# Altium PCB PCB.PcbDoc (part 3 of 3)
Units mm, origin at the board's own origin, x right, y up, seen from the top; angles counter-clockwise.
Board outline 82.04 x 50.04 mm, 4 copper layers (Top Layer, Layer 1, Layer 2, Bottom Layer), stack 1.604 mm thick; 179 components, 140 nets, 1023 pads, 520 vias.
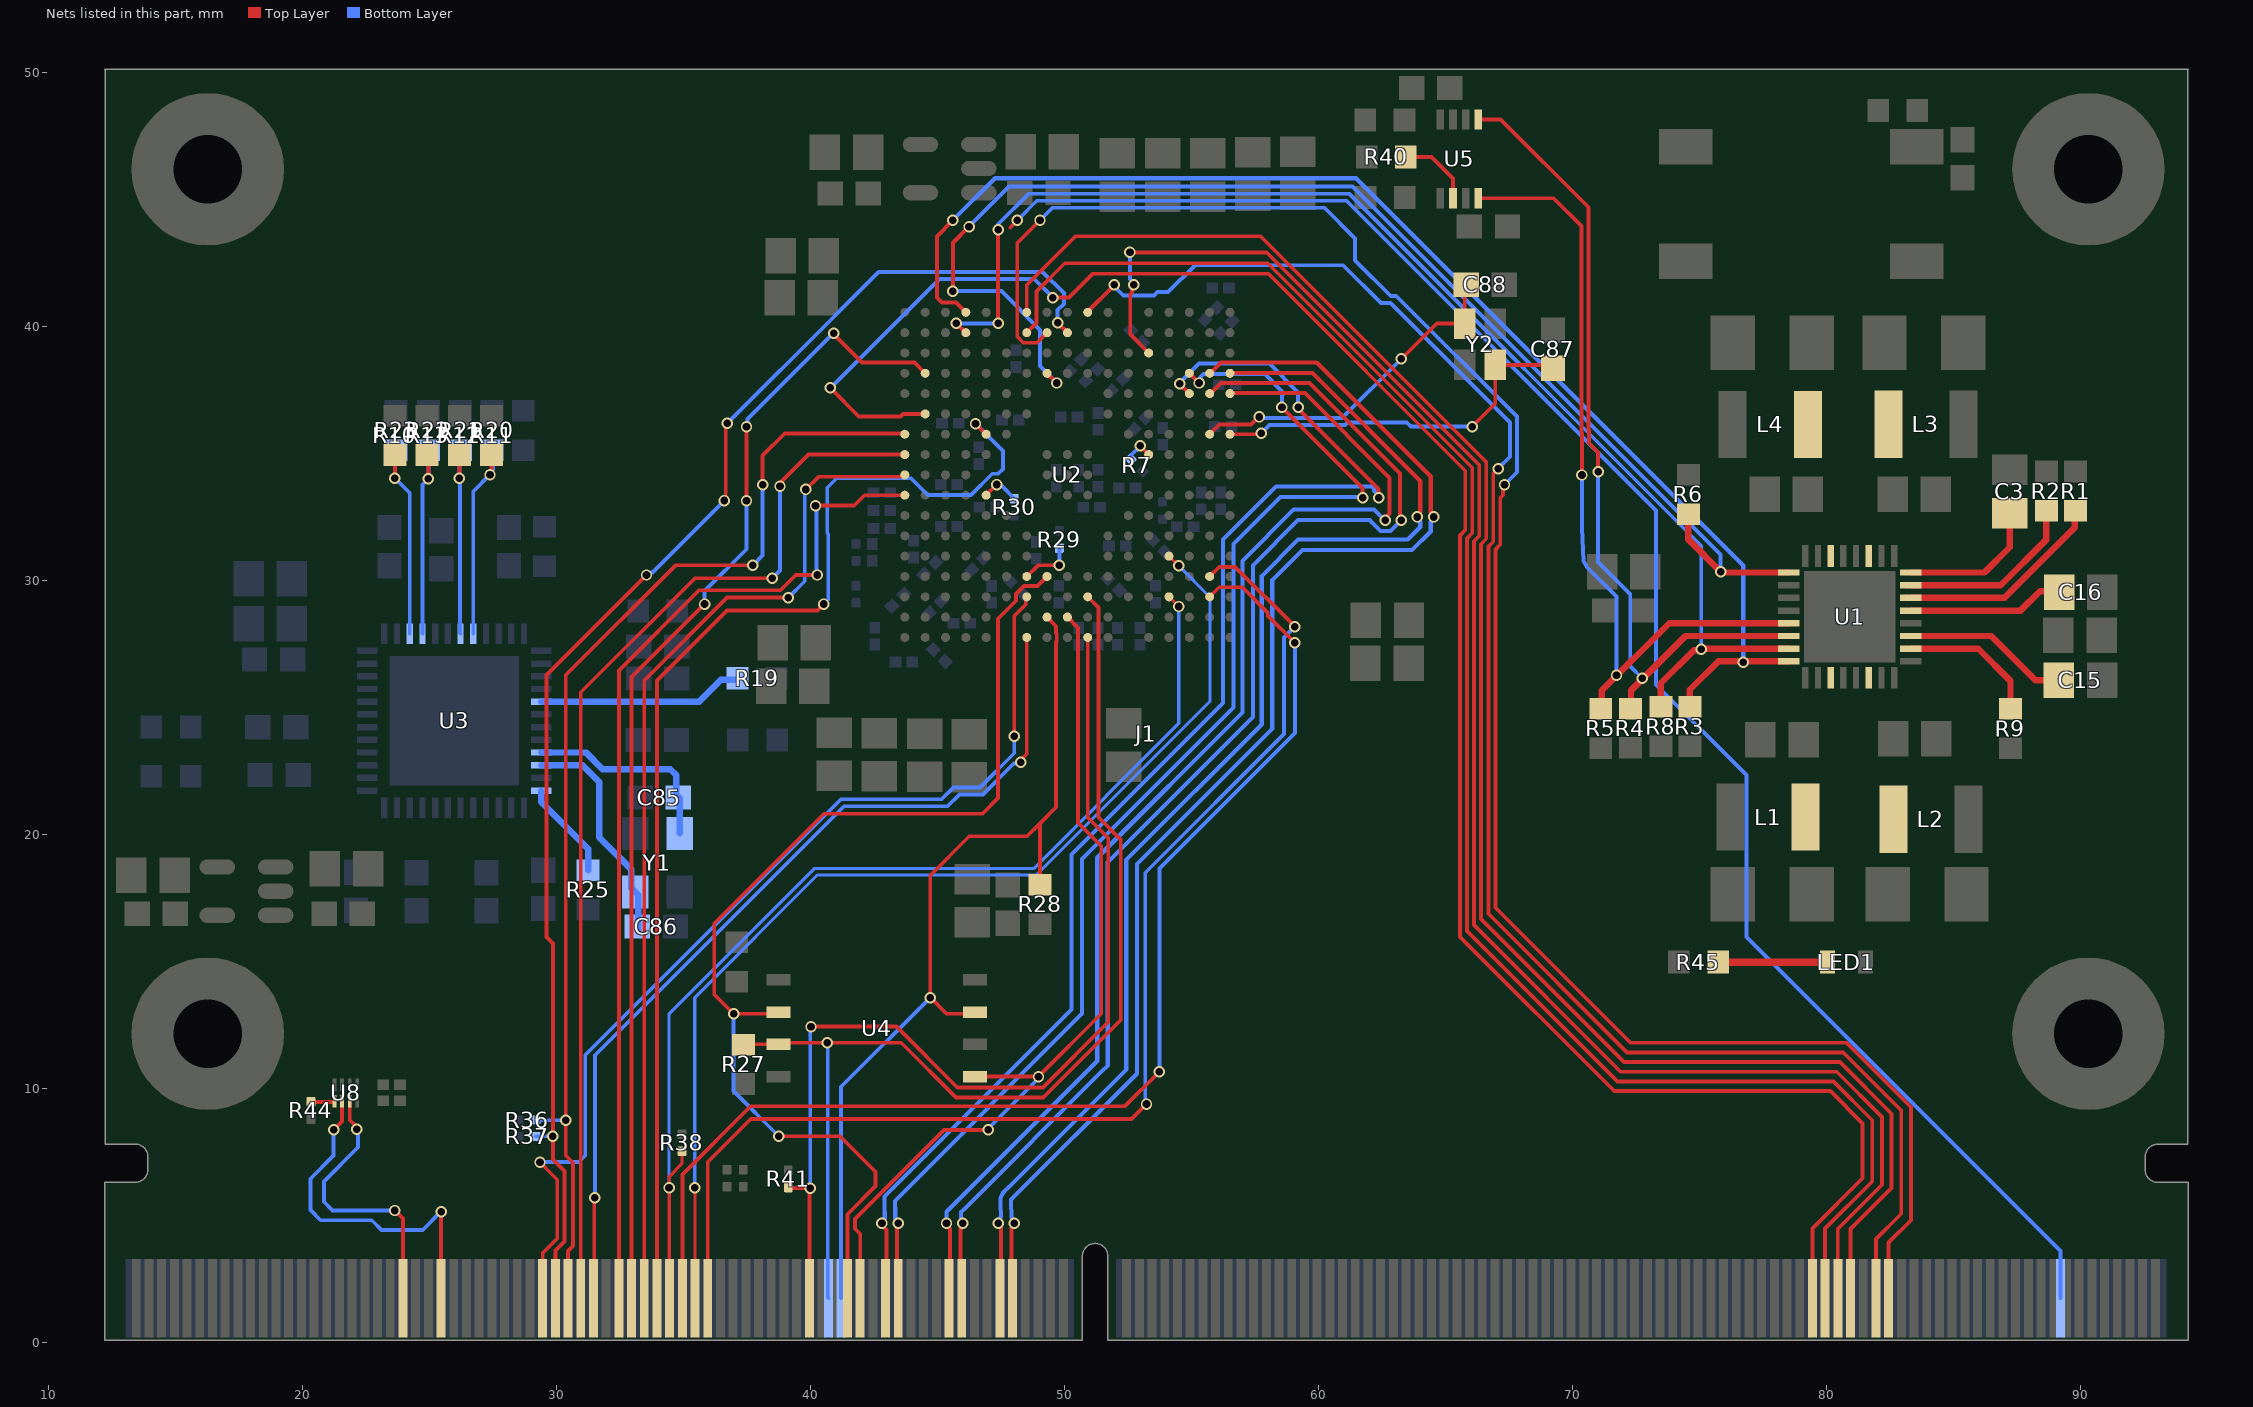
[diagram p5: the nets of this part, all layers, seen from the top]

## Via types
v1: diameter 0.45, hole 0.3, Top Layer to Bottom Layer, tented both sides, 367 vias
v2: diameter 0.8, hole 0.5, Top Layer to Bottom Layer, tented both sides, 87 vias
v3: diameter 0.5, hole 0.2, Top Layer to Bottom Layer, 34 vias
v4: diameter 0.8, hole 0.5, Top Layer to Bottom Layer, 32 vias

## Nets (pads, with @x,y where several pads share a name; then routed paths per layer and width w, separated by ;. In a path a pad name is that pad's centre, name@x,y a point inside that pad or via, vN(x,y) a via of type N, cw(c..) or ccw(c..) an arc to the next point about the centre after c; other vN are vias at no path point) (continued)
MPU_QSPI_CS_SMARC: J1.P54 R41.1 U2.A8 | length 40.8
  Top Layer w0.15: R41.1@39.112,6.112 39.128,6.095 39.954,6.095 v1(39.97,6.079) 39.942,6.051 J1.P54@39.942,1.751 ; v1(40.005,12.446) 43.376,12.446 45.767,10.055 49.137,10.055 51.71,12.628 51.71,19.872 50.9,20.681 U2.A8@50.9,27.768
  Bottom Layer w0.15: v1@39.942,6.079 39.974,6.111 39.974,12.415 v1(40.005,12.446)
MPU_QSPI_IO0: J1.P58 U2.B9 U4.5 | length 35
  Top Layer w0.15: J1.P58@41.942,1.751 41.942,4.286 41.739,4.489 41.739,4.875 45.246,8.382 v1(46.99,8.382) ; U4.5@46.465,10.48 v1(48.961,10.48) 51.435,12.954 51.435,19.558 50.522,20.471 50.522,28.146 U2.B9@50.1,28.568
  Bottom Layer w0.15: v1(46.99,8.382) 46.99,8.445 48.961,10.417 v1(48.961,10.48)
MPU_QSPI_IO1: J1.P57 U2.D10 U4.2 | length 44.1
  Top Layer w0.15: U4.2@38.725,13.02 38.659,12.954 v1(36.957,12.954) 36.195,13.716 36.195,16.51 40.513,20.828 46.756,20.828 47.371,21.443 47.371,28.505 48.078,29.212 48.078,29.481 48.388,29.791 48.922,29.791 U2.D10@49.3,30.168 ; v1(38.735,8.128) 41.148,8.128 42.545,6.731 42.545,6.165 41.442,5.062 J1.P57@41.442,1.751
  Bottom Layer w0.15: v1(36.957,12.954) 36.957,9.906 v1(38.735,8.128)
MPU_QSPI_IO2: J1.S56 R27.1 U2.C8 U4.3 | length 44.3
  Top Layer w0.128: R27.1@37.353,11.736 37.367,11.75 U4.3@38.725,11.75
  Top Layer w0.15: U4.3@38.725,11.75 38.786,11.811 v1(40.64,11.811) 43.561,11.811 45.72,9.652 49.149,9.652 52.197,12.7 52.197,19.812 51.322,20.687 51.322,28.946 U2.C8@50.9,29.368
  Bottom Layer w0.15: v1(40.64,11.811) 40.666,11.785 40.666,1.776 J1.S56@40.692,1.75
MPU_QSPI_IO3: J1.S57 R28.1 U2.B10 U4.7 | length 36.1
  Top Layer w0.15: U4.7@46.465,13.02 46.399,12.954 45.339,12.954 v1(44.704,13.589) 44.704,18.407 46.236,19.939 48.514,19.939 49.022,20.447 ; R28.1@49.022,18.034 49.022,20.447 ; U2.B10@49.3,28.568 49.657,28.212 49.657,27.946 49.678,27.925 49.678,27.612 49.657,27.591 49.657,21.082 49.022,20.447
  Bottom Layer w0.15: J1.S57@41.192,1.75 41.192,10.077 v1@44.588,13.473
MPU_SD_DETECT: J1.P35 R36.1 U2.L17 | length 45.5
  Top Layer w0.15: J1.P35@30.442,1.751 30.442,3.615 30.633,3.806 30.633,7.086 30.353,7.366 v1(30.353,8.763) 30.353,26.289 34.671,30.607 v1(37.719,30.607) ; v1(38.1,33.782) 38.1,34.925 38.972,35.797 43.672,35.797 U2.L17@43.7,35.768
  Bottom Layer w0.15: R36.1@29.166,8.763 v1(30.353,8.763) ; v1(37.719,30.607) 38.1,30.988 v1(38.1,33.782)
MPU_SDMMC0_CK: J1.P36 U2.K17 | length 42.5
  Top Layer w0.15: J1.P36@30.942,1.751 30.942,25.608 35.433,30.099 v1(38.481,30.099) ; v1(38.785,33.721) 38.785,33.848 39.905,34.968 U2.K17@43.7,34.968
  Bottom Layer w0.15: v1(38.481,30.099) 38.785,30.403 v1(38.785,33.721)
MPU_SDMMC0_CMD: J1.P34 R37.1 U2.T9 | length 56.5
  Top Layer w0.15: 29.845,7.212 v1(29.845,8.128) 29.845,15.714 29.591,15.968 29.591,26.289 v1(33.528,30.226) ; v1@36.576,33.147 36.65,33.221 36.65,36.142 v1(36.703,36.195)
  Top Layer w0.16: 29.845,7.212 30.296,6.761 30.296,3.992 29.942,3.638 J1.P34@29.942,1.751 ; v1(49.718,40.151) U2.T9@50.1,39.768
  Bottom Layer w0.15: R37.1@29.166,8.128 v1(29.845,8.128) ; v1(33.528,30.226) 33.609,30.226 33.709,30.326 33.765,30.326 v1(36.597,33.157) ; v1(36.703,36.195) 40.964,40.456
  Bottom Layer w0.16: 40.964,40.456 42.672,42.164 49.122,42.164 49.96,41.326 49.96,40.899 49.718,40.657 v1(49.718,40.151)
MPU_SDMMC0_DAT0: J1.P39 U2.H17 | length 40.5
  Top Layer w0.15: J1.P39@32.442,1.751 32.442,26.473 35.597,29.628 38.806,29.628 39.404,30.226 v1(40.259,30.226) ; v1(40.182,32.959) 41.709,32.959 42.118,33.368 U2.H17@43.7,33.368
  Bottom Layer w0.15: v1(40.182,32.959) 40.221,32.921 40.221,30.264 v1(40.259,30.226)
MPU_SDMMC0_DAT1: J1.P40 U2.P16 | length 45.5
  Top Layer w0.15: J1.P40@32.942,1.751 32.942,26.211 v1(35.814,29.083) ; v1(37.465,33.147) v1(37.465,36.068) ; v1@40.918,39.69 42.017,38.591 44.078,38.591 U2.P16@44.5,38.168
  Bottom Layer w0.15: v1(35.814,29.083) 35.814,29.591 37.465,31.242 v1(37.465,33.147) ; v1(37.465,36.068) 37.506,36.109 37.506,36.363 v1(40.894,39.751)
MPU_SDMMC0_DAT2: J1.P41 U2.J17 | length 40
  Top Layer w0.15: J1.P41@33.442,1.751 33.442,26.076 36.703,29.337 v1(39.116,29.337) ; v1(39.801,33.594) 40.298,34.091 43.51,34.091 43.547,34.129 43.661,34.129 U2.J17@43.7,34.168
  Bottom Layer w0.15: v1(39.116,29.337) 39.757,29.978 39.757,33.55 v1(39.801,33.594)
MPU_SDMMC0_DAT3: J1.P42 U2.L13 | length 47.4
  Top Layer w0.15: J1.P42@33.942,1.751 33.942,26.068 36.703,28.829 40.259,28.829 v1(40.513,29.083) ; v1(46.481,36.185) U2.L13@46.898,35.768
  Bottom Layer w0.15: v1(40.513,29.083) 40.684,29.254 40.684,31.837 40.646,31.874 40.646,33.661 41.021,34.036 43.942,34.036 44.601,33.377 46.306,33.377 47.141,34.213 47.374,34.213 47.563,34.401 47.563,35.103 v1(46.481,36.185)
MPU_SPI3_CS: J1.P43 R38.1 U2.C4 | length 42.8
  Top Layer w0.128: J1.P43@34.442,1.751 34.429,1.763 34.429,6.084 v1(34.417,6.096) 34.417,6.544 34.925,7.052 R38.1@34.925,7.537 ; U2.C4@54.1,29.368 v1(54.483,28.986)
  Bottom Layer w0.128: v1(34.417,6.096) 34.417,12.954 40.132,18.669 48.768,18.669 54.483,24.384 v1(54.483,28.986)
MPU_SPI3_MISO: J1.P45 U2.E4 | length 43.3
  Top Layer w0.128: v1(35.433,6.096) 35.438,6.091 35.438,1.755 J1.P45@35.442,1.751 ; U2.E4@54.1,30.968 v1(54.483,30.586)
  Bottom Layer w0.128: v1(35.433,6.096) 35.433,13.589 40.26,18.416 48.873,18.416 55.713,25.257 55.713,29.355 v1(54.483,30.586)
MPU_SPI3_MOSI: J1.P46 U2.D2 | length 49.3
  Top Layer w0.15: J1.P46@35.942,1.751 35.942,7.113 37.636,8.807 52.622,8.807 v1(53.213,9.398) ; U2.D2@55.7,30.168 56.078,30.546 56.703,30.546 v1(59.055,28.194)
  Bottom Layer w0.15: v1(53.213,9.398) 53.166,9.445 53.166,18.503 58.63,23.967 58.63,27.769 v1(59.055,28.194)
MPU_SPI3_SCK: J1.P44 U2.C2 | length 48.9
  Top Layer w0.15: J1.P44@34.942,1.751 34.942,6.621 37.636,9.315 52.368,9.315 v1(53.721,10.668) ; U2.C2@55.7,29.368 56.078,29.746 56.995,29.746 57.984,28.757 57.984,28.63 v1(59.055,27.559)
  Bottom Layer w0.15: v1(53.721,10.668) 53.721,18.669 59.055,24.003 v1(59.055,27.559)
MPU_UART4_CTS: J1.P131 U2.R5 | length 66.8
  Top Layer w0.15: v1(52.563,42.926) 57.952,42.926 66.316,34.562 66.316,31.766 66.103,31.553 66.103,16.447 71.882,10.668 80.391,10.668 82.169,8.89 82.169,6.223 80.431,4.485 J1.P131@80.431,1.751 ; v1(52.705,41.656) 52.648,41.599 52.648,41.353 52.578,41.283 52.578,39.691 U2.R5@53.3,38.968
  Bottom Layer w0.15: v1(52.563,42.926) 52.571,42.919 52.571,41.872 52.705,41.737 v1(52.705,41.656)
MPU_UART4_RTS: J1.P132 U2.U11 | length 69
  Top Layer w0.15: U2.U11@48.5,40.568 48.5,41.642 50.419,43.561 57.705,43.561 66.591,34.675 66.591,31.653 66.378,31.44 66.378,16.68 72.009,11.049 80.518,11.049 82.55,9.017 82.55,6.096 80.931,4.477 J1.P132@80.931,1.751
MPU_UART4_RX: J1.P130 U2.T11 | length 67.9
  Top Layer w0.15: U2.T11@48.5,39.768 48.878,40.146 48.878,41.385 49.994,42.501 57.988,42.501 66.041,34.448 66.041,31.88 65.828,31.667 65.828,16.214 71.755,10.287 80.264,10.287 81.788,8.763 81.788,6.35 79.931,4.493 J1.P130@79.931,1.751
MPU_UART4_TX: J1.P129 U2.M16 | length 80
  Top Layer w0.15: v1(40.767,37.592) 41.888,36.471 43.533,36.471 43.63,36.568 U2.M16@44.5,36.568 ; v1(49.53,41.148) 50.165,41.148 51.107,42.09 53.647,42.09 58.009,42.09 65.766,34.334 65.766,31.994 65.553,31.781 65.553,15.981 71.628,9.906 80.137,9.906 81.407,8.636 81.407,6.477 79.431,4.501 J1.P129@79.431,1.751
  Bottom Layer w0.15: v1(40.767,37.592) 45.059,41.884 48.794,41.884 v1(49.53,41.148)
MPU_UART5_RX: J1.P135 U2.T10 | length 76.5
  Top Layer w0.15: v1(49.022,44.196) 48.122,43.296 48.122,39.612 48.364,39.37 48.902,39.37 U2.T10@49.3,39.768 ; v1(67.31,33.782) 67.253,33.725 67.253,33.369 67.141,33.257 67.141,31.425 66.95,31.234 66.95,17.124 72.263,11.811 80.772,11.811 83.312,9.271 83.312,4.826 82.431,3.945 J1.P135@82.431,1.751
  Bottom Layer w0.15: v1(49.022,44.196) 49.509,44.683 60.219,44.683 61.424,43.478 61.424,42.615 62.829,41.21 63.049,41.21 67.797,36.462 67.797,34.269 v1(67.31,33.782)
MPU_UART5_TX: J1.P134 U2.U8 | length 67.3
  Top Layer w0.15: v1(67.056,34.417) 66.866,34.227 66.866,31.539 66.675,31.348 66.675,16.891 72.136,11.43 80.645,11.43 82.931,9.144 82.931,5.08 81.931,4.08 J1.P134@81.931,1.751
  Top Layer w0.16: U2.U8@50.9,40.568 50.9,40.591 51.943,41.634 v1(51.943,41.656)
  Bottom Layer w0.15: v1(51.943,41.656) 51.943,41.586 52.298,41.231 53.516,41.231 53.65,41.365 54.065,41.365 55.118,42.418 60.96,42.418 62.443,40.935 62.824,40.935 67.522,36.237 67.522,34.883 v1(67.056,34.417)
MPU_USBHS0_D_N: J1.P70 U2.P2 | length 52.6
  Top Layer w0.16: J1.P70@47.942,1.751 47.899,1.794 47.899,3.894 47.895,3.898 47.895,4.51 48.006,4.621 v1(48.006,4.699) ; U2.P2@55.7,38.168 55.722,38.168 56.139,38.586 59.917,38.586 64.405,34.097 64.405,32.701 64.516,32.59 v1(64.516,32.512)
  Bottom Layer w0.16: v1(48.006,4.699) 47.907,4.939 cw(c48.055,5) 47.895,5 47.895,5.147 ccw(c47.322,5.146) 47.892,5.209 47.884,5.283 ccw(c47.313,5.22) 47.883,5.286 47.88,5.315 cw(c48.039,5.334) 47.879,5.333 47.879,5.571 cw(c48.039,5.571) 47.926,5.684 52.832,10.591 52.832,18.846 58.166,24.18 58.166,30.022 59.353,31.209 63.671,31.209 64.405,31.943 64.405,32.323 64.516,32.434 v1(64.516,32.512)
MPU_USBHS0_D_P: J1.P69 U2.P1 | length 51
  Top Layer w0.16: v1(47.371,4.699) 47.371,4.621 47.482,4.51 47.482,3.726 47.485,3.723 47.485,1.794 J1.P69@47.442,1.751 ; U2.P1@56.5,38.168 56.504,38.172 59.745,38.172 63.992,33.926 63.992,32.701 63.881,32.59 v1(63.881,32.512)
  Bottom Layer w0.16: v1(47.371,4.699) 47.47,4.939 ccw(c47.322,5) 47.482,5 47.482,5.146 ccw(c47.322,5.146) 47.481,5.163 47.472,5.238 ; 47.472,5.238 47.469,5.267 cw(c48.039,5.334) 47.465,5.331 47.465,5.571 cw(c48.039,5.571) 47.632,5.976 47.758,6.102 52.418,10.762 52.418,19.017 57.752,24.351 57.752,30.193 59.182,31.623 63.5,31.623 63.992,32.115 63.992,32.323 63.881,32.434 v1(63.881,32.512)
MPU_USBHS1_D_N: J1.P66 U2.N2 | length 51.6
  Top Layer w0.15: U2.N2@55.7,37.368 55.731,37.368 56.153,37.791 59.618,37.791
  Top Layer w0.16: J1.P66@45.942,1.751 45.899,1.794 45.899,4.46 45.919,4.48 45.919,4.644 v1(45.974,4.699) ; 59.623,37.791 59.633,37.791 63.201,34.222 63.201,32.43 v1(63.246,32.385)
  Bottom Layer w0.16: v1(45.974,4.699) 45.919,4.754 45.919,5.152 46.04,5.273 51.446,10.679 51.689,10.922 51.689,18.923 57.404,24.638 57.404,30.607 59.182,32.385 62.003,32.385 62.433,31.955 62.816,31.955 v1(63.246,32.385)
MPU_USBHS1_D_P: J1.P65 U2.N1 | length 50
  Top Layer w0.15: U2.N1@56.5,37.368 56.519,37.387 59.451,37.387
  Top Layer w0.16: v1(45.339,4.699) 45.339,4.621 45.485,4.475 45.485,1.794 J1.P65@45.442,1.751 ; 59.451,37.387 62.787,34.051 62.787,32.639 62.611,32.463 v1(62.611,32.385)
  Bottom Layer w0.16: v1(45.339,4.699) 45.339,5.157 45.626,5.444 51.275,11.093 51.275,19.094 56.99,24.809 56.99,30.778 59.011,32.799 62.174,32.799 62.588,32.385 v1(62.611,32.385)
MPU_USBHS2_D_N: J1.P61 U2.P3 | length 51.1
  Top Layer w0.16: v1(43.434,4.699) 43.399,4.664 43.399,1.794 J1.P61@43.442,1.751 ; U2.P3@54.9,38.168 v1(55.283,37.786) ; v1(58.547,36.83) 58.811,36.566 61.717,33.66 61.717,33.279 v1(61.722,33.274)
  Bottom Layer w0.16: v1(43.434,4.699) 43.434,4.777 43.323,4.888 43.323,5.3 43.307,5.317 43.307,5.588 50.673,12.954 50.673,19.05 56.642,25.019 56.642,31.454 58.491,33.303 61.693,33.303 v1(61.722,33.274) ; v1(55.283,37.786) 55.338,37.841 55.338,38.013 55.46,38.134 57.878,38.134 58.637,37.375 58.557,37.295 58.557,36.84 v1(58.547,36.83)
MPU_USBHS2_D_P: J1.P60 U2.N3 | length 54.3
  Top Layer w0.16: v1(42.799,4.699) 42.799,4.621 42.985,4.435 42.985,1.794 J1.P60@42.942,1.751 ; v1(54.518,37.751) U2.N3@54.9,37.368 ; v1(59.182,36.83) 59.182,36.78 62.354,33.609 62.354,33.277 v1(62.357,33.274)
  Bottom Layer w0.16: v1(42.799,4.699) 42.799,4.777 42.91,4.888 42.91,5.129 42.893,5.146 42.893,5.759 50.259,13.125 50.259,19.221 56.228,25.19 56.228,31.625 58.319,33.717 62.071,33.717 62.165,33.623 62.165,33.545 62.357,33.352 v1(62.357,33.274) ; v1(54.518,37.751) 54.518,37.777 55.288,38.548 58.049,38.548 59.182,37.415 v1(59.182,36.83)
MPU_WKUP: R8.1 U1.7 U2.T14 | length 50.6
  Top Layer w0.15: v1(45.72,40.132) 46.084,39.768 U2.T14@46.1,39.768 ; v1(47.371,40.132) v1(47.371,43.815)
  Top Layer w0.254: R8.1@73.465,25.033 73.465,25.967 74.765,27.267 75.019,27.267 v1(75.057,27.305) ; v1@75.075,27.323 78.497,27.323 U1.7@78.499,27.325
  Bottom Layer w0.15: v1(45.72,40.132) v1(47.371,40.132) ; v1(47.371,43.815) 47.371,44.035 48.569,45.233 61.201,45.233 75.057,31.377 v1(75.057,27.305)
NetC85_2: C85.2 U3.45 Y1.1 | length 8
  Bottom Layer w0.254: U3.45@29.383,23.239 31.145,23.239 31.8,22.584 34.467,22.584 34.709,22.342 34.709,21.568 34.834,21.443 Y1.1@34.834,20.051
NetC86_2: C86.2 U3.46 Y1.3 | length 9
  Bottom Layer w0.254: U3.46@29.383,22.739 31.01,22.739 31.673,22.076 31.673,19.895 32.935,18.633 32.935,17.9 Y1.3@33.084,17.751 33.197,17.638 C86.2@33.197,16.234
NetC87_2: C87.2 U2.L1 Y2.1 | length 14.9
  Top Layer w0.15: U2.L1@56.5,35.768 v1@57.693,35.768 ; v1(66.04,36.068) 66.944,36.972 Y2.1@66.944,38.497 69.084,38.497 C87.2@69.215,38.366
  Bottom Layer w0.15: v1(57.727,35.8) 58.057,36.13 61.03,36.13 61.133,36.233 63.463,36.233 63.628,36.068 v1(66.04,36.068)
NetC88_2: C88.2 U2.L2 Y2.3 | length 13.4
  Top Layer w0.15: U2.L2@55.7,35.768 56.078,36.146 57.324,36.146 57.627,36.449 v1(57.658,36.449) ; v1(63.246,38.735) 64.643,40.132 65.734,40.132 Y2.3@65.744,40.122 65.744,41.602 C88.2@65.798,41.656
  Bottom Layer w0.15: v1(57.658,36.449) 57.702,36.405 60.916,36.405 v1(63.246,38.735)
NetL1_1: L1.1 U1.11
NetL2_1: L2.1 U1.14
NetL3_1: L3.1 U1.27
NetL4_1: L4.1 U1.30
NetLED1_1: LED1.1 R45.1 | length 4.3
  Top Layer w0.3: R45.1@75.718,14.986 LED1.1@80.022,14.986
NetR1_1: R1.1 U1.22 | length 8.3
  Top Layer w0.254: U1.22@83.299,29.325 86.983,29.325 89.754,32.096 89.754,32.718 R1.1@89.789,32.753
NetR2_1: R2.1 U1.23 | length 7.2
  Top Layer w0.254: U1.23@83.299,29.825 86.848,29.825 88.646,31.623 R2.1@88.646,32.753
NetR7_2: R7.2 U2.K5 | length 1.2
  Top Layer w0.15: v1@52.963,35.306 U2.K5@53.3,34.968
  Bottom Layer w0.15: R7.2@52.593,34.783 52.591,34.785 52.591,34.926 v1(52.973,35.308)
NetR9_1: R9.1 U1.18 | length 5.6
  Top Layer w0.254: U1.18@83.299,27.325 85.959,27.325 87.229,26.055 R9.1@87.229,24.954
NetR10_1: R10.1 R23.1 U3.27 | length 8.7
  Top Layer w0.15: v1(23.622,34.036) R10.1@23.622,35.205
  Bottom Layer w0.15: R23.1@23.672,35.144 23.622,35.094 v1(23.622,34.036) 24.208,33.45 U3.27@24.208,27.914
NetR11_2: R11.2 R20.1 U3.32 | length 8.6
  Top Layer w0.15: v1(27.368,34.181) 27.368,34.262 27.432,34.325 R11.2@27.432,35.205
  Bottom Layer w0.15: U3.32@26.708,27.914 26.708,33.52 v1(27.368,34.181) 27.368,34.262 27.482,34.376 R20.1@27.482,35.144
NetR12_2: R12.2 R21.1 U3.31 | length 8.4
  Top Layer w0.15: v1(26.162,34.036) R12.2@26.162,35.205
  Bottom Layer w0.15: U3.31@26.208,27.914 26.185,27.937 26.185,34.013 v1(26.162,34.036) 26.162,35.094 R21.1@26.212,35.144
NetR13_2: R13.2 R22.1 U3.28 | length 8.5
  Top Layer w0.15: R13.2@24.892,35.205 24.942,35.155 v1(24.942,34.014)
  Bottom Layer w0.15: U3.28@24.708,27.914 24.708,33.78 v1(24.942,34.014) R22.1@24.942,35.144
NetR19_1: R19.1 U3.41 | length 8
  Bottom Layer w0.254: U3.41@29.383,25.239 35.598,25.239 36.454,26.095 R19.1@37.045,26.095
NetR25_2: R25.2 U3.48 | length 3.9
  Bottom Layer w0.254: U3.48@29.383,21.739 29.383,21.29 31.228,19.445 R25.2@31.228,18.605
NetR29_2: R29.2 U2.D11 | length 2.1
  Top Layer w0.15: U2.D11@48.5,30.168 48.939,30.607 v1(49.784,30.607)
  Bottom Layer w0.15: v1(49.784,30.607) R29.2@49.784,31.286
NetR30_2: R30.2 U2.H13 | length 1.5
  Top Layer w0.15: U2.H13@46.9,33.371 v1(47.317,33.788)
  Bottom Layer w0.15: v1(47.317,33.788) 47.374,33.73 47.519,33.73 48.006,33.243 R30.2@48.006,33.23
NetR40_1: R40.1 U5.6 | length 3
  Top Layer w0.15: R40.1@63.428,46.689 64.436,46.689 65.282,45.843 U5.6@65.282,45.059
NetR44_2: R44.2 U8.5 | length 1
  Top Layer w0.15: R44.2@20.32,9.481 21.244,9.481 U8.5@21.244,9.51
PMIC_I2C_SCL: R4.1 U1.6 U5.1 | length 33
  Top Layer w0.15: U5.1@66.282,48.159 67.157,48.159 70.612,44.704 70.612,35.941 70.633,35.92 70.633,35.412 70.993,35.052 v1(70.993,34.29)
  Top Layer w0.254: R4.1@72.29,25.005 72.29,25.681 74.434,27.825 U1.6@78.499,27.825
  Bottom Layer w0.15: v1(70.993,34.29) 70.993,30.734 72.263,29.464 72.263,26.631 v1(72.733,26.16)
PMIC_I2C_SDA: R5.1 U1.5 U5.8 | length 31.9
  Top Layer w0.15: U5.8@66.282,45.059 69.241,45.059 70.337,43.963 70.337,35.827 70.358,35.806 v1(70.358,34.163)
  Top Layer w0.254: R5.1@71.143,24.964 71.143,25.677 73.791,28.325 U1.5@78.499,28.325
  Bottom Layer w0.15: v1(70.358,34.163) 70.358,32.09 70.413,30.765 cw(c69.977,30.353) 70.545,30.547 70.568,30.524 71.717,29.375 v1(71.717,26.287)
PMIC_NINTO: R6.1 U1.1 U2.P10 | length 52.2
  Top Layer w0.16: v1(45.593,41.402) 45.593,43.307 v1(46.228,43.942) ; U2.P10@49.3,38.168 v1(49.683,37.786)
  Top Layer w0.254: R6.1@74.549,32.626 74.549,31.623 75.847,30.325 U1.1@78.499,30.325
  Bottom Layer w0.16: v1(45.593,41.402) 47.498,41.402 49.022,39.878 49.022,38.447 v1(49.683,37.786) ; v1(46.228,43.942) 47.809,45.523 61.321,45.523 75.819,31.025 v1(75.819,30.353)
PMIC_NRSTO: J1.S150 | length 68.5
  Top Layer w0.15: 47.847,43.91 v1(48.133,44.196)
  Bottom Layer w0.15: v1(48.133,44.196) 48.895,44.958 61.087,44.958 73.279,32.766 73.279,31.75 73.279,25.908 76.835,22.352 76.835,15.97 89.197,3.608 J1.S150@89.197,1.751
PMIC_NSTRT: C3.2 U1.24 | length 5.7
  Top Layer w0.254: U1.24@83.299,30.325 86.205,30.325 87.197,31.317 C3.2@87.197,32.663
PMIC_PWRHLD: R3.2 U1.8 U2.U14 | length 51.7
  Top Layer w0.16: v1(45.593,44.196) 44.958,43.561 44.958,41.148 45.155,40.951 45.717,40.951 U2.U14@46.1,40.568
  Top Layer w0.254: R3.2@74.608,25.033 74.608,25.713 75.72,26.825 76.68,26.825 v1(76.708,26.797) 76.734,26.823 78.497,26.823 U1.8@78.499,26.825
  Bottom Layer w0.16: v1(45.593,44.196) 47.244,45.847 61.468,45.847 76.708,30.607 v1(76.708,26.797)
SAM_SDIO_PWR_EN: J1.P37 U2.A11 | length 36.1
  Top Layer w0.15: J1.P37@31.442,1.751 31.469,1.778 31.469,5.688 v1(31.496,5.715) ; v1(48.26,22.86) 48.26,22.941 48.5,23.181 U2.A11@48.5,27.768
  Bottom Layer w0.15: v1(31.496,5.715) 31.496,11.319 41.301,21.124 45.381,21.124 45.847,21.59 46.778,21.59 47.99,22.803 48.203,22.803 v1(48.26,22.86)
SAM_SDIO_WP: J1.P33 U2.C11 | length 39.9
  Top Layer w0.15: v1(29.337,7.112) 29.565,6.884 29.565,6.869 30.016,6.418 30.016,4.108 29.442,3.534 J1.P33@29.442,1.751 ; v1(48.006,23.876) 48.006,28.608 48.461,29.063 48.461,29.329 U2.C11@48.5,29.368
  Bottom Layer w0.15: v1(29.337,7.112) 30.861,7.112 31.115,7.366 31.115,11.327 41.187,21.399 45.148,21.399 45.614,21.865 46.664,21.865 48.006,23.207 v1(48.006,23.876)
SMARC_GBE0_LINK1000#: J1.P22 U8.7 | length 11.2
  Top Layer w0.15: U8.7@21.844,9.51 21.844,8.767 22.119,8.492 v1(22.119,8.411) ; v1(23.622,5.207) 23.942,4.887 J1.P22@23.942,1.751
  Bottom Layer w0.15: v1(22.119,8.411) 22.177,8.353 22.177,7.699 20.828,6.35 20.828,5.549 21.17,5.207 v1(23.622,5.207)
SMARC_GBE0_LINK_ACT#: J1.P25 U8.6 | length 14
  Top Layer w0.15: v1(21.209,8.382) 21.544,8.717 U8.6@21.544,9.51 ; J1.P25@25.442,1.751 v1(25.442,5.165)
  Bottom Layer w0.15: v1(21.209,8.382) 21.209,7.366 20.299,6.456 20.299,5.228 20.701,4.826 22.712,4.826 23.093,4.445 24.722,4.445 v1(25.442,5.165)
VLDO1: C15.2 U1.19 | length 6.6
  Top Layer w0.254: U1.19@83.299,27.825 86.475,27.825 88.213,26.087 C15.2@89.134,26.087
VLDO2: C16.2 U1.21 | length 6.2
  Top Layer w0.254: U1.21@83.299,28.825 87.626,28.825 88.392,29.591 89.106,29.591 C16.2@89.15,29.547
pads on no net: J1.P1 J1.P3 J1.P4 J1.P5 J1.P6 J1.P7 J1.P8 J1.P10 J1.P11 J1.P13 J1.P14 J1.P16 J1.P17 J1.P21 J1.P28 J1.P31 J1.P48 J1.P49 J1.P51 J1.P52 J1.P55 J1.P62 J1.P63 J1.P64 J1.P67 J1.P71 J1.P72 J1.P73 J1.P74 J1.P75 J1.P76 J1.P77 J1.P78 J1.P80 J1.P81 J1.P83 J1.P84 J1.P86 J1.P87 J1.P89 J1.P90 J1.P92 J1.P93 J1.P95 J1.P96 J1.P98 J1.P99 J1.P101 J1.P102 J1.P104 J1.P105 J1.P106 J1.P107 J1.P123 J1.P124 J1.P125 J1.P126 J1.P128 J1.P138 J1.P139 J1.P140 J1.P141 J1.P145 J1.P146 J1.S1 J1.S2 J1.S4 J1.S5 J1.S6 J1.S7 J1.S8 J1.S9 J1.S11 J1.S12 J1.S13 J1.S14 J1.S15 J1.S17 J1.S18 J1.S19 J1.S20 J1.S21 J1.S22 J1.S23 J1.S24 J1.S26 J1.S27 J1.S28 J1.S29 J1.S30 J1.S31 J1.S32 J1.S33 J1.S35 J1.S36 J1.S37 J1.S38 J1.S39 J1.S40 J1.S41 J1.S42 J1.S43 J1.S44 J1.S45 J1.S46 J1.S50 J1.S51 J1.S52 J1.S53 J1.S54 J1.S55 J1.S58 J1.S59 J1.S60 J1.S62 J1.S63 J1.S65 J1.S66 J1.S68 J1.S69 J1.S71 J1.S72 J1.S74 J1.S75 J1.S76 J1.S77 J1.S78 J1.S79 J1.S81 J1.S82 J1.S84 J1.S85 J1.S87 J1.S88 J1.S90 J1.S91 J1.S93 J1.S94 J1.S95 J1.S96 J1.S97 J1.S98 J1.S99 J1.S100 J1.S102 J1.S103 J1.S104 J1.S105 J1.S106 J1.S107 J1.S108 J1.S109 J1.S111 J1.S112 J1.S113 J1.S114 J1.S115 J1.S116 J1.S117 J1.S118 J1.S120 J1.S121 J1.S122 J1.S123 J1.S139 J1.S140 J1.S142 J1.S145 J1.S146 J1.S148 J1.S149 J1.S151 J1.S152 J1.S153 J1.S155 J1.S156 J1.S157 U1.17 U2.B8 U2.C5 U2.C17 U2.D1 U2.D3 U2.D5 U2.D7 U2.D8 U2.D16 U2.E1 U2.E3 U2.E16 U2.F2 U2.G3 U2.G4 U2.G15 U2.H4 U2.H14 U2.H15 U2.K15 U2.L14 U2.M5 U2.N11 U2.N14 U2.N17 U2.P8 U2.P9 U2.P11 U2.P13 U2.P15 U2.P17 U2.R2 U2.R4 U2.R11 U2.R16 U2.R17 U2.T7 U2.T13 U2.T15 U2.T17 U2.U4 U2.U5 U2.U7 U2.U9 U2.U10 U2.U13 U2.U15 U2.U16 U3.13 U3.14 U3.43 U3.47 U6.4 U7.4

## Polygon pours and split planes (outlines as drawn)
5V on Top Layer "5V_L01_P026" (solid, pour order 26): 72.009,31.242 72.009,28.067 73.279,28.067 73.787,28.575 78.994,28.575 78.994,29.083 77.851,29.083 77.851,29.591 74.93,29.591 73.279,31.242
3V3 on Top Layer "3V3_L01_P099" (solid, pour order 99): 75.057,34.925 71.501,34.925 71.501,32.004 72.644,32.004 72.644,33.528 75.057,33.528
GND on Top Layer "GND_L01_P123" (solid, pour order 123): 82.366,14.369 82.303,14.432 82.303,16.404 80.906,16.404 80.906,14.372 82.303,14.372
3V3 on Top Layer "3V3_L01_P122" (solid, pour order 122): 74.866,14.348 74.803,14.411 74.803,16.383 73.406,16.383 73.406,14.351 74.803,14.351
GND on Top Layer "GND_L01_P027" (solid, pour order 27): 78.181,18.941 78.181,16.18 78.19,16.172 83.651,16.172 83.651,18.966 78.181,18.966
5V on Top Layer "5V_L01_P094" (solid, pour order 94): 18.034,19.558 21.717,19.558 21.717,14.732 18.034,14.732
ETH1V8 on Top Layer "ETH1V8_L01_P050" (solid, pour order 50): 14.224,19.431 15.748,19.431 15.748,17.78 17.526,17.78 17.526,15.24 14.224,15.24
5V on Top Layer "5V_L01_P049" (solid, pour order 49): 87.376,2.921 93.472,2.921 93.472,6.223 87.376,6.223
3V3 on Top Layer "Top Layer-3V3" (solid, pour order 121): 75.565,16.256 77.878,16.256 77.878,22.606 76.862,22.606 76.862,25.146 77.37,25.654 79.529,25.654 79.529,26.67 76.481,26.67 75.565,25.754 75.565,21.59 75.565,24.257 70.739,24.257 70.739,16.256 75.565,16.256 75.565,21.59
GND on Top Layer "GND_L01_P116" (solid, pour order 116): 64.262,29.21 64.262,24.765 61.087,24.765 61.087,25.908 62.738,25.908 62.738,29.21
2V5 on Top Layer "2V5_L01_P115" (solid, pour order 115): 61.087,25.908 61.087,29.972 62.738,29.972 62.738,25.908
3V3 on Top Layer "3V3_L01_P114" (solid, pour order 114): 56.572,45.957 56.589,45.974 60.452,45.974 60.452,42.164 59.436,42.164 57.785,43.815 56.572,43.815
GND on Top Layer "GND_L01_P113" (solid, pour order 113): 51.181,45.974 59.944,45.974 59.944,48.641 51.181,48.641
CORE1V15 on Top Layer "CORE1V15_L01_P112" (solid, pour order 112): 51.181,45.974 56.515,45.974 56.515,43.688 51.181,43.688
MPU1V8 on Top Layer "MPU1V8_L01_P111" (solid, pour order 111): 39.751,40.259 39.751,43.942 45.212,43.942 45.212,41.783 42.291,41.783 42.291,40.259
GND on Top Layer "GND_L01_P110" (solid, pour order 110): 38.1,43.942 38.1,40.259 39.751,40.259 39.751,43.942
GND on Top Layer "GND_L01_P000" (solid, pour order 0): 51.789,33.02 48.233,33.02 48.233,35.946 50.519,35.946 50.519,34.676 51.789,34.676
GND on Top Layer "GND_L01_P105" (solid, pour order 105): 41.402,47.625 41.402,43.942 38.1,43.942 38.1,47.625
GND on Top Layer "GND_L01_P104" (solid, pour order 104): 49.149,48.514 49.106,48.471 49.106,44.664 50.633,44.664 50.673,44.704 50.673,48.514
3V3 on Top Layer "3V3_L01_P103" (solid, pour order 103): 45.974,44.45 45.974,48.514 49.149,48.514 49.149,44.45
DDR1V35 on Top Layer "DDR1V35_L01_P098" (solid, pour order 98): 39.624,28.448 39.624,23.368 46.99,23.368 46.99,26.162 42.037,26.162 42.037,28.448
GND on Top Layer "GND_L01_P096" (solid, pour order 96): 13.945,19.44 13.945,15.392 13.945,15.24 12.319,15.24 12.319,19.431 13.97,19.431
GND on Top Layer "GND_L01_P095" (solid, pour order 95): 21.717,19.558 23.495,19.558 23.495,14.732 21.717,14.732
ETH1V8 on Top Layer "ETH1V8_L01_P090" (solid, pour order 90): 45.466,13.843 45.466,17.399 49.911,17.399 49.911,13.843
DDR1V35 on Top Layer "DDR1V35_L01_P087" (solid, pour order 87): 90.043,24.638 93.853,24.638 93.853,16.256 90.805,16.256 90.805,20.066 90.043,20.066
GND on Top Layer "GND_L01_P068" (solid, pour order 68): 46.863,23.114 38.608,23.114 38.608,21.336 46.863,21.336
GND on Top Layer "GND_L01_P067" (solid, pour order 67): 39.37,28.448 39.37,25.019 36.576,25.019 36.576,28.448
ETH1V15 on Top Layer "Top Layer-ETH1V15" (solid, pour order 47): 75.311,37.084 75.311,31.432 76.264,30.48 79.312,30.48 79.312,31.496 77.153,31.496 76.708,31.941 76.708,34.544 77.661,34.544 77.661,40.894 75.311,40.894 70.993,40.894 70.993,37.084
MPU1V8 on Top Layer "MPU1V8_L01_P059" (solid, pour order 59): 41.402,47.625 41.402,43.942 45.212,43.942 45.212,46.863 43.18,46.863 43.18,47.625
NetL4_1 on Top Layer "Top Layer-NetL4_1" (solid, pour order 9): 78.359,34.671 80.01,34.671 80.01,30.471 80.382,30.471 80.391,30.48 80.391,31.55 80.772,31.55 80.772,37.973 78.359,37.973
NetL3_1 on Top Layer "Top Layer-NetL3_1" (solid, pour order 11): 81.471,30.48 81.48,30.471 81.852,30.471 81.852,34.671 83.503,34.671 83.503,37.973 81.026,37.973 81.026,31.563 81.471,31.563
GND on Top Layer "GND_L01_P012" (solid, pour order 12): 78.223,40.87 78.223,38.109 78.232,38.1 83.693,38.1 83.693,40.894 78.223,40.894
NetL2_1 on Top Layer "Top Layer-NetL4_1" (solid, pour order 14): 83.439,22.479 81.788,22.479 81.788,26.679 81.416,26.679 81.407,26.67 81.407,25.6 81.026,25.6 81.026,19.177 83.439,19.177
NetL1_1 on Top Layer "Top Layer-NetL3_1" (solid, pour order 15): 80.327,26.67 80.318,26.679 79.946,26.679 79.946,22.479 78.295,22.479 78.295,19.177 80.772,19.177 80.772,25.587 80.327,25.587
5V on Top Layer "Top Layer-5V" (solid, pour order 19): 79.439,31.623 79.439,30.471 79.947,30.471 79.947,34.408 78.422,34.408 78.422,31.623
5V on Top Layer "Top Layer-5V 1" (solid, pour order 20): 82.423,31.75 83.439,31.75 83.439,34.417 81.915,34.417 81.915,30.48 82.423,30.48
5V on Top Layer "Top Layer-5V 2" (solid, pour order 22): 79.468,25.4 78.452,25.4 78.452,22.733 79.976,22.733 79.976,26.67 79.468,26.67
5V on Top Layer "Top Layer-5V 3" (solid, pour order 23): 82.359,25.4 82.359,26.679 81.852,26.679 81.852,22.742 83.376,22.742 83.376,25.4
GND on Top Layer "GND_L01_P028" (solid, pour order 28): 71.755,28.067 71.755,31.242 69.342,31.242 69.342,28.067
GND on Top Layer "GND_L01_P029" (solid, pour order 29): 90.551,33.528 90.551,36.703 86.36,36.703 86.36,33.626 86.347,33.613 86.432,33.528
GND on Top Layer "GND_L01_P030" (solid, pour order 30): 93.345,30.353 93.345,25.019 89.916,25.019 89.916,30.353
DDR1V35 on Top Layer "Top Layer-DDR1V35" (solid, pour order 45): 84.201,16.256 90.805,16.256 90.805,20.066 86.487,20.066 86.487,25.654 85.598,26.543 82.55,26.543 82.55,25.527 84.709,25.527 85.154,25.082 85.154,22.479 84.201,22.479
CORE1V15 on Top Layer "Top Layer-CORE1V15" (solid, pour order 46): 86.36,37.084 90.678,37.084 90.678,40.894 84.074,40.894 84.074,34.544 85.09,34.544 85.09,32.004 84.582,31.496 82.423,31.496 82.423,30.48 85.471,30.48 86.36,31.369
3V3 on Layer 1 "3V3_L02_P078" (solid, pour order 78): 54.1,38.968 54.062,39.006 54.062,43.307 68.453,43.307 68.453,21.463 75.311,21.463 75.311,16.637 70.392,16.637 65.024,16.637 65.024,37.592 62.103,37.592 60.727,38.968
ETH1V15 on Layer 1 "ETH1V15_L02_P109" (solid, pour order 109): 70.993,37.084 70.993,45.974 66.421,45.974 66.421,46.736 61.976,46.736 61.976,47.879 48.768,47.879 48.768,48.514 45.847,48.514 45.847,46.109 42.299,46.109 42.164,45.974 42.164,26.797 30.226,26.797 30.099,26.67 30.099,28.575 28.702,28.575 28.702,29.972 27.559,29.972 27.559,27.665 23.061,27.665 22.987,27.592 22.987,23.241 15.367,23.241 12.319,26.289 12.319,50.038 12.446,50.165 75.311,50.165 75.311,37.084
5V on Layer 1 "5V_L02_P101" (solid, pour order 101): 86.614,21.59 70.485,21.59 70.485,27.178 71.628,27.178 71.628,31.75 72.644,31.75 72.644,33.274 90.17,33.274 90.17,28.575 86.614,28.575
MPU1V8 on Layer 1 "MPU1V8_L02_P060" (solid, pour order 60): 42.164,45.974 50.038,45.974 50.038,39.116 42.164,39.116 42.164,42.545
CORE1V15 on Layer 1 "CORE1V15_L02_P089" (solid, pour order 89): 51.816,33.401 51.816,36.195 51.562,36.449 47.752,36.449 47.752,39.116 51.746,39.116 51.768,39.095 51.768,38.021 53.134,38.021 53.213,37.943 53.34,38.07 53.34,39.116 54.102,39.116 54.102,37.276 52.959,36.133 52.959,33.401
ETH1V8 on Layer 1 "ETH1V8_L02_P091" (solid, pour order 91): 12.319,19.177 14.224,19.177 14.224,21.717 18.923,21.717 18.923,23.241 15.367,23.241 12.319,26.289
3V3 on Layer 1 "3V3_L02_P079" (solid, pour order 79): 65.532,16.772 56.396,16.772 56.388,16.764 56.388,19.685 49.403,19.685 49.403,25.146 48.006,25.146 48.006,30.226 48.776,30.226 48.912,30.361 50.199,30.361 50.199,29.244 50.165,29.21 52.07,29.21 65.532,29.21
2V5 on Layer 1 "2V5_L02_P057" (solid, pour order 57): 56.134,37.211 56.134,38.862 60.96,38.862 62.23,37.592 65.024,37.592 65.024,29.337 57.277,29.337 57.277,37.211
ETH1V8 on Layer 1 "ETH1V8_L02_P120" (solid, pour order 120): 24.384,19.685 24.384,23.241 18.923,23.241 18.923,21.717 14.224,21.717 14.224,15.24 17.907,15.24 17.907,19.597 17.819,19.685 20.193,19.685 20.193,21.101 20.31,21.219 20.32,21.209 23.241,21.209 23.241,19.685
3V3 on Layer 1 "3V3_L02_P117" (solid, pour order 117): 75.311,21.598 75.319,21.59 92.533,21.59 92.533,14.859 88.138,14.859 88.138,5.715 22.189,5.715 22.189,9.906 24.003,9.906 24.003,7.62 86.36,7.62 86.36,16.256 90.805,16.256 90.805,20.075 90.796,20.066 83.82,20.066 83.82,16.764 83.693,16.637 75.311,16.637 75.311,21.463
5V on Layer 1 "5V_L02_P092" (solid, pour order 92): 93.472,4.064 17.907,4.064 17.907,15.621 17.907,19.431 17.653,19.685 20.193,19.685 20.193,5.715 93.345,5.715 93.472,5.588 93.472,4.445
DDR1V35 on Layer 1 "DDR1V35_L02_P088" (solid, pour order 88): 90.043,23.241 93.853,23.241 93.853,49.784 75.311,49.784 75.311,37.084 70.993,37.084 70.993,45.974 50.165,45.974 50.165,40.894 50.038,40.767 52.324,40.767 52.324,39.116 51.746,39.116 51.746,38.157 51.689,38.1 51.846,37.943 53.213,37.943 53.213,41.406 53.213,44.704 69.85,44.704 69.85,35.56 70.231,35.179 76.708,35.179 76.708,41.021 91.059,41.021 91.059,25.4 90.868,25.209 90.043,25.209
5V on Layer 1 "5V_L02_P085" (solid, pour order 85): 93.472,4.953 93.472,6.223 92.075,6.223 92.075,8.382 94.216,8.382 94.216,23.241 90.043,23.241 90.043,28.448 89.916,28.575 86.614,28.575 86.614,21.59 92.533,21.59 92.533,14.859 88.138,14.859 88.138,4.953
DDR1V35 on Layer 1 "DDR1V35_L02_P062" (solid, pour order 62): 90.81,20.08 90.805,20.075 90.805,16.256 86.36,16.256 86.36,7.62 53.086,7.62 53.086,16.891 47.879,16.891 47.879,23.241 39.37,23.241 39.37,24.892 49.276,24.892 49.276,19.431 56.134,19.431 56.134,16.637 83.947,16.637 83.82,16.764 83.82,20.066 90.805,20.066
3V3 on Layer 1 "3V3_L02_P119" (solid, pour order 119): 22.479,6.503 22.453,6.477 20.193,6.477 20.193,21.336 20.32,21.209 23.241,21.209 23.241,19.685 21.971,19.685 21.971,9.906 22.437,9.906 22.437,6.545
2V5 on Layer 1 "2V5_L02_P056" (solid, pour order 56): 56.515,37.211 57.277,37.211 57.277,29.21 53.848,29.21 50.165,29.21 50.165,30.353 53.078,30.353 53.078,31.242 53.34,31.242 55.499,33.401 55.499,36.195
3V3 on Layer 1 "3V3_L02_P100" (solid, pour order 100): 67.818,20.447 70.485,20.447 70.485,27.178 71.628,27.178 71.628,31.75 72.644,31.75 72.644,33.274 72.471,33.447 67.818,33.447
ETH1V8 on Layer 1 "ETH1V8_L02_P118" (solid, pour order 118): 24.003,15.359 23.995,15.367 21.971,15.367 21.971,9.906 24.003,9.906
ETH1V8 on Layer 1 "ETH1V8_L02_P093" (solid, pour order 93): 39.243,23.241 47.879,23.241 47.879,16.891 52.832,16.891 52.832,7.62 24.003,7.62 24.003,15.359 28.821,15.359 28.956,15.494 28.956,19.685 39.243,19.685
CORE1V15 on Layer 1 "CORE1V15_L02_P071" (solid, pour order 71): 90.932,40.767 90.932,36.957 85.852,36.957 85.852,33.274 68.58,33.274 68.58,43.434 53.34,43.434 53.34,44.704 69.723,44.704 69.723,35.052 76.835,35.052 76.835,40.767
MPU1V8 on Layer 1 "MPU1V8_L02_P106" (solid, pour order 106): 48.768,45.974 60.96,45.974 60.96,46.99 59.309,46.99 48.768,46.99
3V3 on Layer 1 "3V3_L02_P107" (solid, pour order 107): 45.847,48.514 45.847,45.974 48.768,45.974 48.768,46.99 60.96,46.99 60.96,45.974 66.421,45.974 66.421,46.736 61.976,46.736 61.976,47.879 48.768,47.879 48.768,48.514
3V3 on Layer 1 "3V3_L02_P075" (solid, pour order 75): 54.102,37.276 54.163,37.215 55.499,37.215 55.499,33.401 53.34,31.242 53.276,31.242 53.276,31.051 52.451,30.226 50.165,30.226 50.038,30.353 48.768,30.353 48.768,32.131 50.292,32.131 50.546,31.877 52.959,31.877 52.959,36.133
ETH1V8 on Layer 1 "ETH1V8_L02_P054" (solid, pour order 54): 24.384,19.685 24.384,17.78 27.813,17.78 27.813,22.653 32.084,22.653 32.131,22.606 32.131,24.636 28.581,24.636 28.519,24.698 28.519,26.797 39.243,26.797 39.243,19.685 28.956,19.685 28.956,15.24 21.971,15.24 21.971,19.685
ETH1V8 on Layer 1 "ETH1V8_L02_P097" (solid, pour order 97): 28.533,26.662 28.575,26.704 28.575,27.559 27.559,27.559 27.559,29.972 28.702,29.972 28.702,28.575 30.099,28.575 30.099,26.67 30.091,26.662
MPU1V8 on Layer 1 "MPU1V8_L02_P070" (solid, pour order 70): 50.038,39.116 52.324,39.116 52.324,40.767 50.038,40.767
MPU1V8 on Layer 1 "MPU1V8_L02_P084" (solid, pour order 84): 47.752,39.116 47.752,36.449 48.133,36.449 48.133,34.036 48.514,33.655 50.546,33.655 50.609,33.591 50.609,32.012 50.411,32.012 50.292,32.131 49.276,32.131 49.276,32.766 48.006,32.766 46.99,33.782 46.99,36.814 45.434,36.814 45.313,36.935 45.313,39.116
3V3 on Layer 1 "3V3_L02_P083" (solid, pour order 83): 49.276,32.131 47.683,32.131 47.675,32.123 46.143,33.655 46.101,33.655 46.101,35.655 44.704,35.655 44.704,37.219 44.726,37.24 44.755,37.211 46.99,37.211 46.99,33.782 48.006,32.766 49.276,32.766
DDR1V35 on Layer 1 "DDR1V35_L02_P066" (solid, pour order 66): 39.37,26.797 42.164,26.797 42.164,29.972 44.704,29.972 44.704,35.655 46.101,35.655 46.101,33.147 47.117,32.131 48.768,32.131 48.768,30.353 47.752,30.353 47.752,24.892 39.37,24.892
CORE1V15 on Layer 1 "CORE1V15_L02_P077" (solid, pour order 77): 54.199,38.008 54.234,37.973 55.626,37.973 55.626,36.322 55.753,36.449 56.515,36.449 56.515,38.989 56.388,38.862 54.102,38.862 54.102,38.1
CORE1V15 on Layer 1 "CORE1V15_L02_P076" (solid, pour order 76): 52.557,31.877 52.557,33.401 50.673,33.401 50.609,33.337 50.609,31.877
CORE1V15 on Layer 1 "CORE1V15_L02_P073" (solid, pour order 73): 54.102,39.116 54.102,44.704 53.34,44.704 53.34,44.323 53.34,39.116
DDR1V35 on Layer 1 "DDR1V35_L02_P063" (solid, pour order 63): 39.37,24.892 39.37,26.797 41.148,26.797 41.148,24.892
ETH1V15 on Layer 1 "ETH1V15_L02_P061" (solid, pour order 61): 42.164,38.989 45.466,38.989 45.466,37.084 44.704,37.084 44.704,29.972 42.164,29.972
ETH1V15 on Layer 1 "ETH1V15_L02_P051" (solid, pour order 51): 22.987,27.592 27.813,27.526 27.813,17.78 24.384,17.78 24.384,23.241 22.987,23.241 22.987,24.384
ETH1V15 on Layer 1 "ETH1V15_L02_P052" (solid, pour order 52): 27.813,22.979 27.813,22.653 32.131,22.606 32.131,24.636 31.621,24.636 27.813,24.636 27.813,23.344
3V3 on Bottom Layer "3V3_L04_P108" (solid, pour order 108): 65.405,42.291 67.945,42.291 67.945,46.609 65.405,46.609
GND on Bottom Layer "GND_L04_P069" (solid, pour order 69): 18.669,26.416 18.669,31.115 15.875,31.115 15.875,26.416
GND on Layer 2 "GND_L03_P081" (solid, pour order 81): 12.197,6.318 13.397,6.318 ccw(c13.397,6.819) 13.898,6.819 13.9,6.82 13.9,7.321 ccw(c13.398,7.321) 13.398,7.823 12.216,7.823 12.216,50.114 12.192,50.138 94.234,50.138 94.216,50.12 94.216,7.816 93.035,7.816 ccw(c93.035,7.314) 92.533,7.314 92.533,6.814 ccw(c93.035,6.814) 93.035,6.312 94.234,6.312 94.234,0.1 94.231,0.103 51.692,0.103 51.692,3.4 ccw(c51.192,3.41) 50.692,3.4 50.692,0.1 12.192,0.1

## Other copper
Top Layer:
  pour cut-out: 75.311,16.129 75.311,21.463

## Silkscreen, mask and mechanical layers (free items; w line width, h text height)
Top Overlay:
  drawing of 10 lines, arcs and shapes, not listed
  text "REV A" at 13.462,34.671 h3
  text "." at 58.928,25.654 h5
  text "ATLAS" at 53.333,16.487 h8
  text "POWERED BY" at 57.15,14.123 h2
  text "DESIGNED AND BUILT BY" at 77.343,7.259 h1.52
  text "RHETT HUMPHREYS" at 78.486,5.608 h1.52